# Altium PCB Dice RGB.PcbDoc
Units mm, origin at the board's own origin, x right, y up, seen from the top; angles counter-clockwise.
Board outline 25 x 52.5 mm, 2 copper layers (Top Layer, Bottom Layer), stack 1.57 mm thick; 111 components, 88 nets, 377 pads, 156 vias.
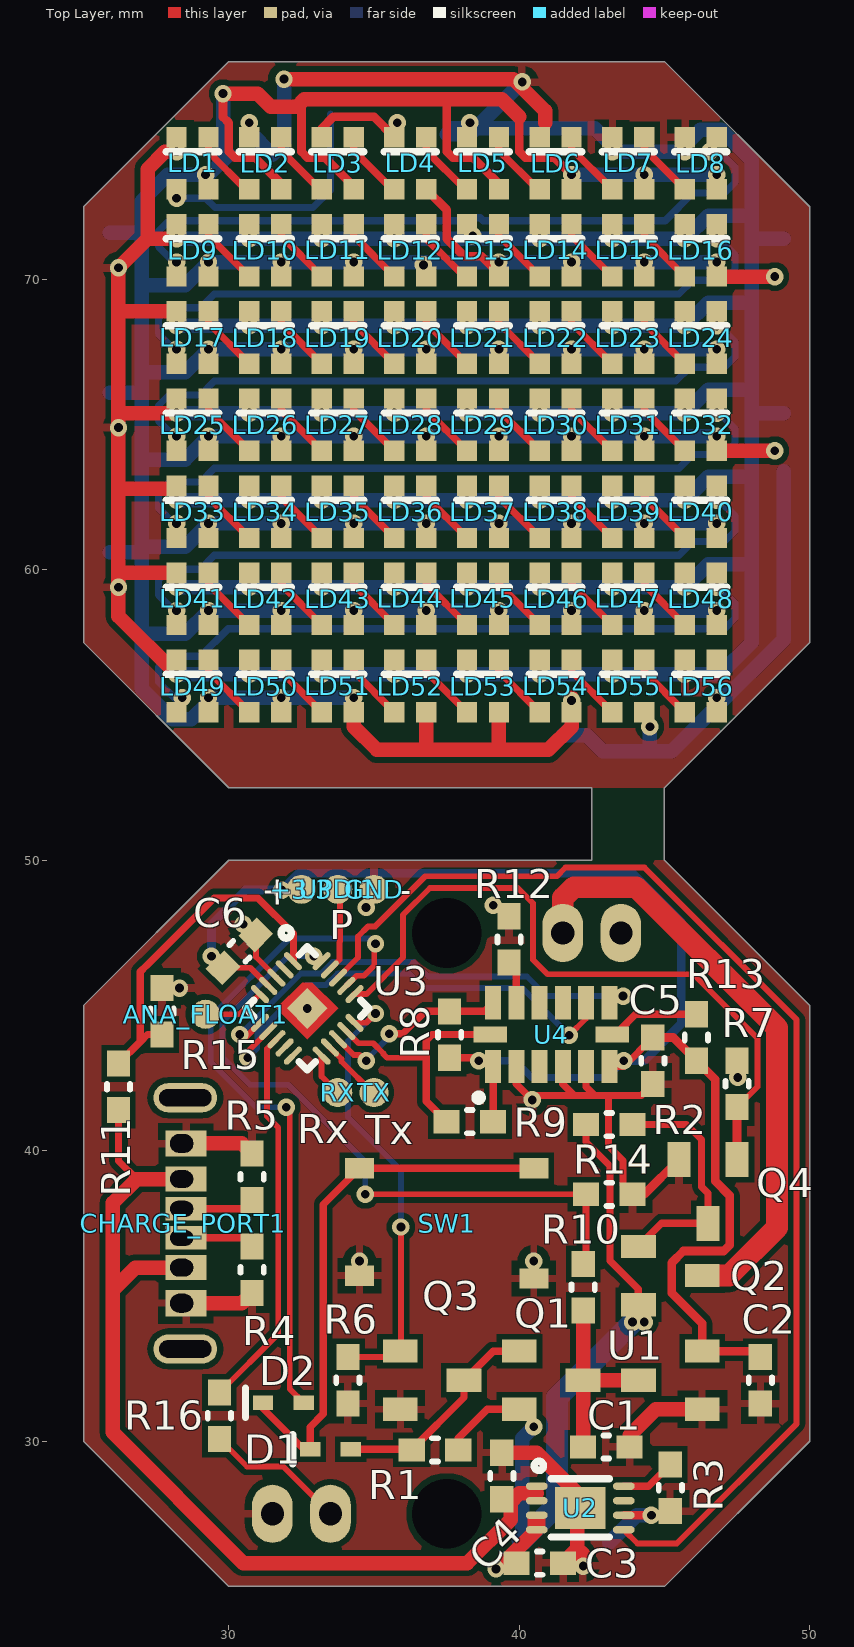
[diagram p0: Top Layer view]
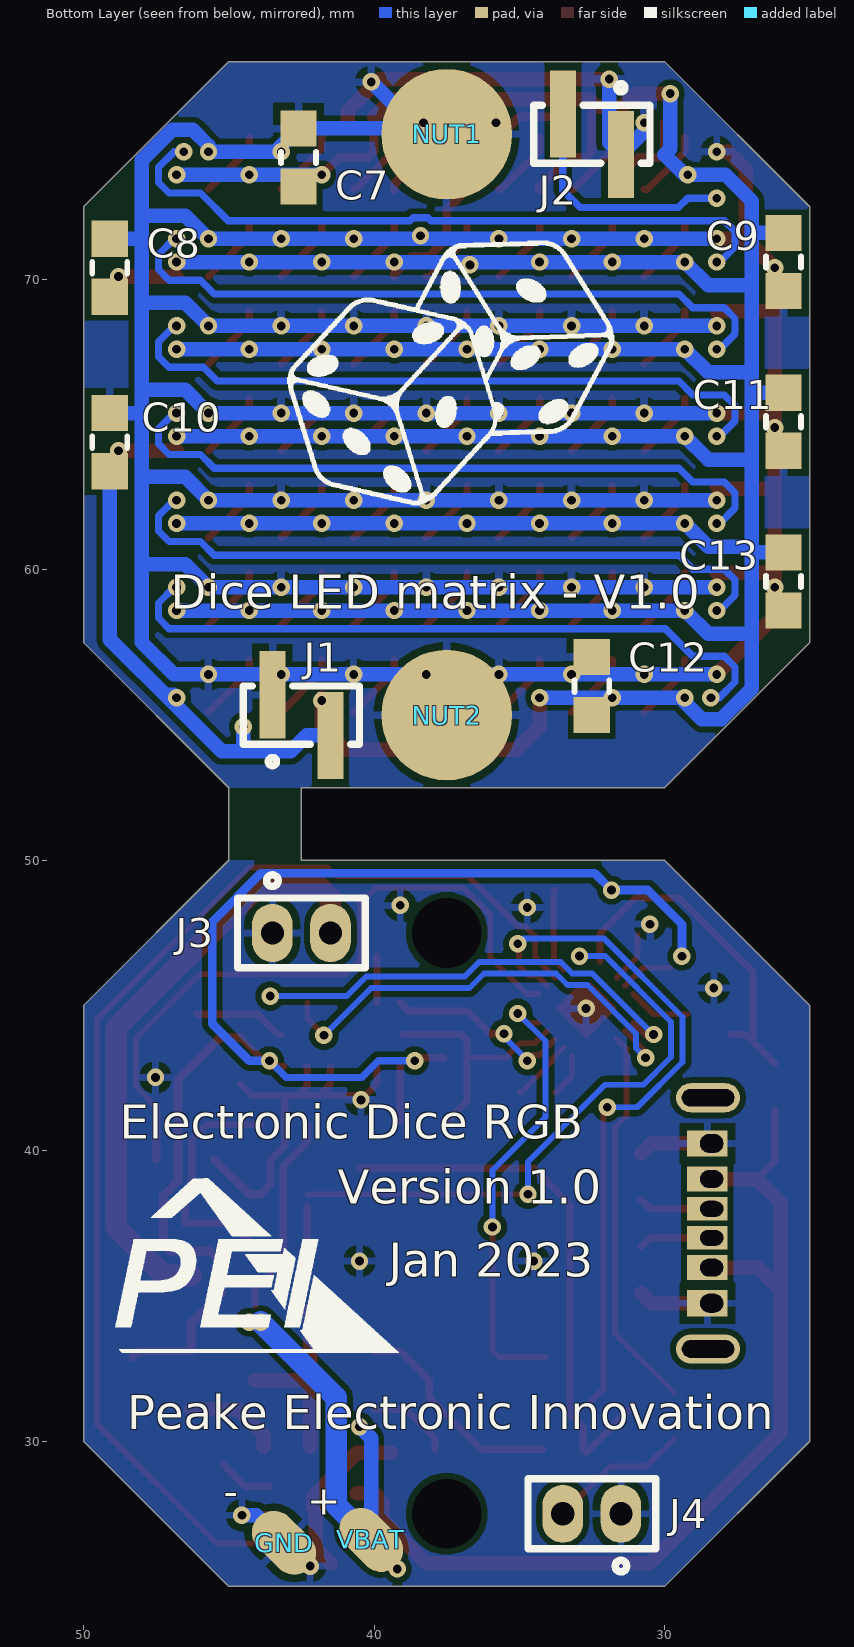
[diagram p1: Bottom Layer view, seen from below]
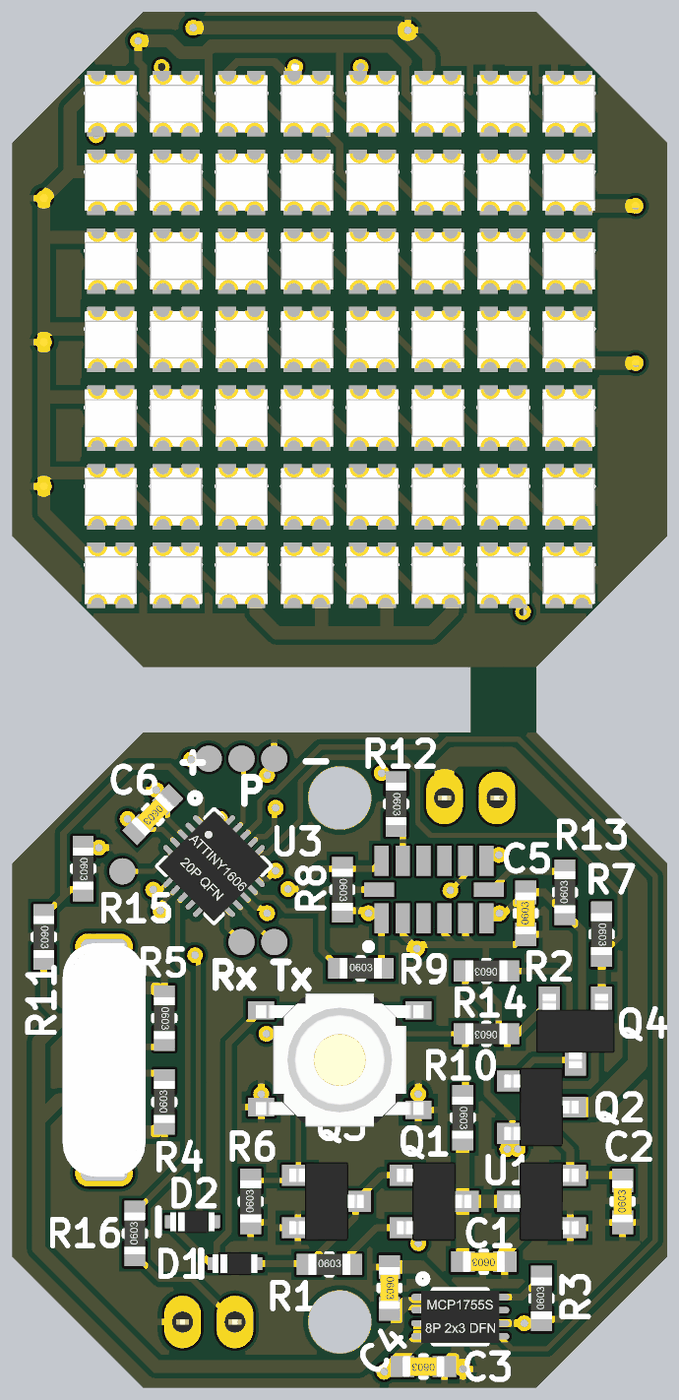
[diagram p2: 3D render of the assembled board from above, using the file's embedded part models]
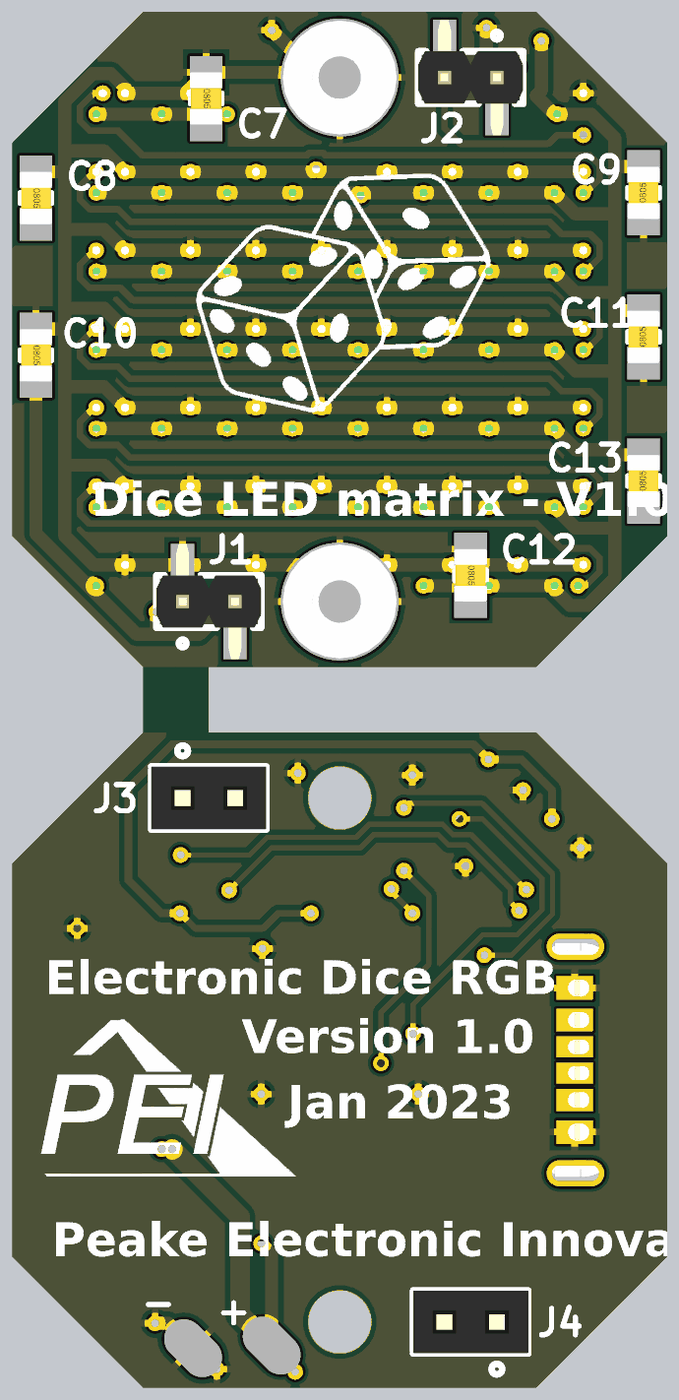
[diagram p3: 3D render of the assembled board from below, using the file's embedded part models]

## Layer stack, top to bottom
Top Solder: solder mask 0.015, Solder Resist, Dk 3.5
Top Layer: signal copper 0.035
Dielectric 1: dielectric 1.5, FR-4, Dk 4.8
Bottom Layer: signal copper 0.035
Bottom Solder: solder mask 0.015, Solder Resist, Dk 3.5

## Board outline
30,25 25,30 25,45 30,50 42.5,50 42.5,52.5 30,52.5 25,57.5 25,72.5 30,77.5 45,77.5 50,72.5 50,57.5 45,52.5 45,50 50,45 50,30 45,25

## Design rules (kind name [scope] priority, off if disabled: settings)
AssemblyTestPointUsage AssemblyTestPointUsage_1 [All] p2:
AssemblyTestpoint AssemblyTestpoint_1 [All] p2: testpointundercomponent=TRUE minsize=1.016 maxsize=2.54 preferedsize=1.524 minholesize=0 maxholesize=1.016 preferedholesize=0.813 testpointgrid=0.025 usegrid=TRUE gridtolerance=0 allowsidetop=TRUE allowsidebottom=TRUE
Clearance [All] p1: gap=0.254 ignorepadtopadclearanceinfootprint=FALSE
Clearance Clearance_1 [All] p2: gap=0.2 ignorepadtopadclearanceinfootprint=FALSE except(0.15: THPad-THPad)
ComponentClearance ComponentClearance_1 [All] p2 off: gap=0.254 collisioncheckmode=3 verticalgap=0.254 showdistances=FALSE
DiffPairsRouting DiffPairsRouting_1 [All] p2: maxlimit=0.254 minlimit=0.254 mostfreqgap=0.254 toplayer_minwidth=0.381 toplayer_maxwidth=0.381 toplayer_prefwidth=0.381 bottomlayer_minwidth=0.381 bottomlayer_maxwidth=0.381 bottomlayer_prefwidth=0.381 maxuncoupledlength=12.7
FabricationTestPointUsage FabricationTestPointUsage_1 [All] p2: valid=0 allowmultiple=FALSE
FabricationTestpoint FabricationTestpoint_1 [All] p2: side=3 testpointundercomponent=TRUE minsize=1.016 maxsize=2.54 preferedsize=1.524 minholesize=0 maxholesize=1.016 preferedholesize=0.813 testpointgrid=0.025 allowsidetop=TRUE allowsidebottom=TRUE usegrid=TRUE gridtolerance=0
FanoutControl Fanout_LCC [IsLCC] p1: bgadir=Out bgaviamode=Centered fanoutstyle=Auto fanoutdirection=Alternating viagrid=0.025 // Fanout_LCC (Default Rule)
FanoutControl Fanout_BGA [IsBGA] p2: bgadir=Out bgaviamode=Centered fanoutstyle=Auto fanoutdirection=Alternating viagrid=0.025 // Fanout_BGA (Default Rule)
FanoutControl Fanout_Default [All] p4: bgadir=Out bgaviamode=Centered fanoutstyle=Auto fanoutdirection=Alternating viagrid=0.025 // Fanout_Default (Default Rule)
FanoutControl Fanout_Small [(CompPinCount < 5)] p5: bgadir=Out bgaviamode=Centered fanoutstyle=Auto fanoutdirection=OutThenIn viagrid=0.025 // Fanout_Small (Default Rule)
FanoutControl Fanout_BGA_1 [IsBGA] p6: bgadir=Out bgaviamode=Centered fanoutstyle=Auto fanoutdirection=Alternating viagrid=0.025 // Fanout_BGA (Default Rule)
FanoutControl Fanout_LCC_1 [IsLCC] p7: bgadir=Out bgaviamode=Centered fanoutstyle=Auto fanoutdirection=Alternating viagrid=0.025 // Fanout_LCC (Default Rule)
FanoutControl Fanout_SOIC_1 [IsSOIC] p8: bgadir=Out bgaviamode=Centered fanoutstyle=Auto fanoutdirection=Alternating viagrid=0.025 // Fanout_SOIC (Default Rule)
FanoutControl Fanout_Small_1 [(CompPinCount < 5)] p9: bgadir=Out bgaviamode=Centered fanoutstyle=Auto fanoutdirection=OutThenIn viagrid=0.025 // Fanout_Small (Default Rule)
FanoutControl Fanout_Default_1 [All] p10: bgadir=Out bgaviamode=Centered fanoutstyle=Auto fanoutdirection=Alternating viagrid=0.025 // Fanout_Default (Default Rule)
Height Height_1 [All] p2: minheight=0 maxheight=25.4 prefheight=12.7
HoleSize HoleSize_1 [All] p2: absolutevalues=TRUE maxlimit=2.54 minlimit=0.025 maxpercent=80.000 minpercent=20.000
HoleToHoleClearance HoleToHoleClearance_1 [All] p2: gap=0.254 allowstackedmicrovias=TRUE
LayerPairs LayerPairs_1 [All] p2: enforce=TRUE
MinimumSolderMaskSliver MinimumSolderMaskSliver_1 [All] p2: minsoldermaskwidth=0.254
NetAntennae NetAntennae_1 [All] p2: netantennaetolerance=0
PasteMaskExpansion PasteMaskExpansion_1 [All] p2: expansion=0
PlaneClearance PlaneClearance_1 [All] p2: clearance=0.508
PlaneConnect PlaneConnect_1 [All] p2: planeconnectstyle=Relief reliefexpansion=0.508 reliefentries=4 reliefconductorwidth=0.254 reliefairgap=0.254
PolygonConnect [All] p1: connectstyle=Relief reliefconductorwidth=0.254 reliefentries=4 polygonreliefangle="90 Angle" airgapwidth=0.254
PolygonConnect PolygonConnect_1 [All] p2: connectstyle=Relief reliefconductorwidth=0.254 reliefentries=4 polygonreliefangle="90 Angle" airgapwidth=0.254
RoutingCorners RoutingCorners_1 [All] p2: cornerstyle=45-Degree minsetback=2.54 maxsetback=2.54
RoutingLayers RoutingLayers_1 [All] p2: top layer_v5=TRUE bottom layer_v5=TRUE
RoutingPriority RoutingPriority_1 [All] p2: routingpriority=0
RoutingTopology RoutingTopology_1 [All] p2: topology=Shortest
RoutingVias [All] p1: holewidth=0.711 width=1.27 viastyle="Through Hole" minholewidth=0.711 minwidth=1.27 maxholewidth=0.711 maxwidth=1.27
RoutingVias RoutingVias_1 [All] p2: holewidth=0.3 width=0.6 viastyle="Through Hole" minholewidth=0.3 minwidth=0.6 maxholewidth=2 maxwidth=3
ShortCircuit ShortCircuit_1 [All] p2: allowed=FALSE
SilkToBoardRegionClearance SilkToBoardRegionClearance_1 [All] p2:
SilkToSilkClearance SilkToSilkClearance_1 [All] p2: silktosilkclearance=0.254
SilkToSolderMaskClearance SilkToSolderMaskClearance_1 [IsPad] p2: minsilkscreentomaskgap=0.254 clearancetoexposedcopper=TRUE
SolderMaskExpansion [All] p1: expansion=0.102 istentingtop=FALSE
SolderMaskExpansion SolderMaskExpansion_1 [InPadClass('All Pads')] p2: expansion=0.102 istentingtop=FALSE
SolderMaskExpansion SolderMaskExpansion_via [All] p3: expansion=0.102 istentingtop=TRUE
UnRoutedNet UnRoutedNet_1 [All] p2:
UnpouredPolygon UnpouredPolygon_1 [All] p2 off:
Width [All] p1: maxlimit=0.254 minlimit=0.254 preferedwidth=0.254
Width Width_1 [All] p2: maxlimit=5 minlimit=0.2 preferedwidth=0.25
26 further rules are at their usual default settings.

## Classes and differential pairs
component class "Dice RGB - Sht 2": C7 C8 C9 C10 C11 C12 C13 J1 J2 LD1 LD2 LD3 LD4 LD5 LD6 LD7 LD8 LD9 LD10 LD11 LD12 LD13 LD14 LD15 LD16 LD17 LD18 LD19 LD20 LD21 LD22 LD23 LD24 LD25 LD26 LD27 LD28 LD29 LD30 LD31 LD32 LD33 LD34 LD35 LD36 LD37 LD38 LD39 LD40 LD41 LD42 LD43 LD44 LD45 LD46 LD47 LD48 LD49 LD50 LD51 LD52 LD53 LD54 LD55 LD56 NUT1 NUT2
component class "Dice RGB - Sht 1": +3.3 ANA_FLOAT1 C1 C2 C3 C4 C5 C6 CHARGE_PORT1 D1 D2 GND J3 J4 Q1 Q2 Q3 Q4 R1 R2 R3 R4 R5 R6 R7 R8 R9 R10 R11 R12 R13 R14 R15 R16 RX SW1 TX U1 U2 U3 U4 UPDI1 VBAT

## Components (designator, comment, footprint, x,y, rotation, side; value= is the part's Value field where it differs from the comment)
+3.3 "Prog Pad" "Prog Pad 1mm" 32.5,49 r90 top
ANA_FLOAT1 "Prog Pad" "Prog Pad 1mm" 29.2,44.7 r90 top
C1 "Capacitor" 0603_CAP 43,29.8 r180 top
C2 "Capacitor" 0603_CAP 48.3,32.1 r90 top
C3 "Capacitor" 0603_CAP 40.7,25.8 r180 top
C4 "Capacitor" 0603_CAP 39.4,28.8 r270 top
C5 "Capacitor" 0603_CAP 44.6,43.1 r90 top
C6 "Capacitor" 0603_CAP 30.366,46.866 r225 top
C7 "Capacitor" 0805_CAP 42.6,74.2 r270 bottom
C8 "Capacitor" 0805_CAP 49.1,70.4 r270 bottom
C9 "Capacitor" 0805_CAP 25.9,70.6 r90 bottom
C10 "Capacitor" 0805_CAP 49.1,64.4 r270 bottom
C11 "Capacitor" 0805_CAP 25.9,65.1 r90 bottom
C12 "Capacitor" 0805_CAP 32.5,56 r270 bottom
C13 "Capacitor" 0805_CAP 25.9,59.6 r90 bottom
CHARGE_PORT1 "USB C" USB-TYPE-C-014 28.5,37.5 r90 top
D1 "Diode" SOD-523 33.5,29.725 r180 top
D2 "Diode" SOD-523 31.875,31.325 r180 top
GND "Prog Pad" "Prog Pad 1mm" 35,49 r90 top
GND "Prog Pad" "Prog Pad 1.5 x 2.5mm" 43.1,26.5 r135 bottom
J1 "2_Pin" "2P 2mm SMD dbl height male header" 42.5,55 r180 bottom locked
J2 "2_Pin" "2P 2mm SMD dbl height male header" 32.5,75 r0 bottom locked
J3 "2_Pin" "2P 2mm PTH female header" 42.5,47.5 r180 bottom locked
J4 "2_Pin" "2P 2mm PTH female header" 32.5,27.5 r0 bottom locked
LD1 "WS2812B" WS2812B-2020 28.75,74 r90 top
LD2 "WS2812B" WS2812B-2020 31.25,74 r90 top
LD3 "WS2812B" WS2812B-2020 33.75,74 r90 top
LD4 "WS2812B" WS2812B-2020 36.25,74 r90 top
LD5 "WS2812B" WS2812B-2020 38.75,74 r90 top
LD6 "WS2812B" WS2812B-2020 41.25,74 r90 top
LD7 "WS2812B" WS2812B-2020 43.75,74 r90 top
LD8 "WS2812B" WS2812B-2020 46.25,74 r90 top
LD9 "WS2812B" WS2812B-2020 28.75,71 r90 top
LD10 "WS2812B" WS2812B-2020 31.25,71 r90 top
LD11 "WS2812B" WS2812B-2020 33.75,71 r90 top
LD12 "WS2812B" WS2812B-2020 36.25,71 r90 top
LD13 "WS2812B" WS2812B-2020 38.75,71 r90 top
LD14 "WS2812B" WS2812B-2020 41.25,71 r90 top
LD15 "WS2812B" WS2812B-2020 43.75,71 r90 top
LD16 "WS2812B" WS2812B-2020 46.25,71 r90 top
LD17 "WS2812B" WS2812B-2020 28.75,68 r90 top
LD18 "WS2812B" WS2812B-2020 31.25,68 r90 top
LD19 "WS2812B" WS2812B-2020 33.75,68 r90 top
LD20 "WS2812B" WS2812B-2020 36.25,68 r90 top
LD21 "WS2812B" WS2812B-2020 38.75,68 r90 top
LD22 "WS2812B" WS2812B-2020 41.25,68 r90 top
LD23 "WS2812B" WS2812B-2020 43.75,68 r90 top
LD24 "WS2812B" WS2812B-2020 46.25,68 r90 top
LD25 "WS2812B" WS2812B-2020 28.75,65 r90 top
LD26 "WS2812B" WS2812B-2020 31.25,65 r90 top
LD27 "WS2812B" WS2812B-2020 33.75,65 r90 top
LD28 "WS2812B" WS2812B-2020 36.25,65 r90 top
LD29 "WS2812B" WS2812B-2020 38.75,65 r90 top
LD30 "WS2812B" WS2812B-2020 41.25,65 r90 top
LD31 "WS2812B" WS2812B-2020 43.75,65 r90 top
LD32 "WS2812B" WS2812B-2020 46.25,65 r90 top
LD33 "WS2812B" WS2812B-2020 28.75,62 r90 top
LD34 "WS2812B" WS2812B-2020 31.25,62 r90 top
LD35 "WS2812B" WS2812B-2020 33.75,62 r90 top
LD36 "WS2812B" WS2812B-2020 36.25,62 r90 top
LD37 "WS2812B" WS2812B-2020 38.75,62 r90 top
LD38 "WS2812B" WS2812B-2020 41.25,62 r90 top
LD39 "WS2812B" WS2812B-2020 43.75,62 r90 top
LD40 "WS2812B" WS2812B-2020 46.25,62 r90 top
LD41 "WS2812B" WS2812B-2020 28.75,59 r90 top
LD42 "WS2812B" WS2812B-2020 31.25,59 r90 top
LD43 "WS2812B" WS2812B-2020 33.75,59 r90 top
LD44 "WS2812B" WS2812B-2020 36.25,59 r90 top
LD45 "WS2812B" WS2812B-2020 38.75,59 r90 top
LD46 "WS2812B" WS2812B-2020 41.25,59 r90 top
LD47 "WS2812B" WS2812B-2020 43.75,59 r90 top
LD48 "WS2812B" WS2812B-2020 46.25,59 r90 top
LD49 "WS2812B" WS2812B-2020 28.75,56 r90 top
LD50 "WS2812B" WS2812B-2020 31.25,56 r90 top
LD51 "WS2812B" WS2812B-2020 33.75,56 r90 top
LD52 "WS2812B" WS2812B-2020 36.25,56 r90 top
LD53 "WS2812B" WS2812B-2020 38.75,56 r90 top
LD54 "WS2812B" WS2812B-2020 41.25,56 r90 top
LD55 "WS2812B" WS2812B-2020 43.75,56 r90 top
LD56 "WS2812B" WS2812B-2020 46.25,56 r90 top
NUT1 "M2 x 4.9mm" "PCB Nut M2-SMD" 37.5,75 r180 bottom locked
NUT2 "M2 x 4.9mm" "PCB Nut M2-SMD" 37.5,55 r180 bottom locked
Q1 "PMOS" SOT-23-PMOS 41.1,32.1 r270 top
Q2 "PMOS" SOT-23-PMOS 45.2,35.7 r270 top
Q3 "NMOS" SOT-23 37,32.1 r270 top
Q4 "NMOS" SOT-23 46.5,38.6 r180 top
R1 "Resistor" 0603_RES 37.1,29.7 r0 top
R2 "Resistor" 0603_RES 43.1,40.9 r180 top
R3 "Resistor" 0603_RES 45.2,28.4 r90 top
R4 "Resistor" 0603_RES 30.8,35.9 r90 top
R5 "Resistor" 0603_RES 30.8,39.1 r270 top
R6 "Resistor" 0603_RES 34.1,32.1 r90 top
R7 "Resistor" 0603_RES 47.5,42.3 r270 top
R8 "Resistor" 0603_RES 37.6,44 r270 top
R9 "Resistor" 0603_RES 38.3,41 r0 top
R10 "Resistor" 0603_RES 42.2,35.3 r270 top
R11 "Resistor" 0603_RES 26.2,42.2 r270 top
R12 "Resistor" 0603_RES 39.65,47.275 r270 top
R13 "Resistor" 0603_RES 46.1,43.9 r90 top
R14 "Resistor" 0603_RES 43.1,38.5 r180 top
R15 "Resistor" 0603_RES 27.7,44.8 r270 top
R16 "Resistor" 0603_RES 29.675,30.875 r90 top
RX "Prog Pad" "Prog Pad 1mm" 33.75,42 r90 top
SW1 "Button" "PTS526 SK15 SMTR2 LFS SMD Tactile Push Button" 37.5,37.5 r0 top locked
TX "Prog Pad" "Prog Pad 1mm" 35,42 r90 top
U1 "LR7533-T" SOT-23 45.2,32.1 r90 top
U2 "MCP73832" "8P 2x3 DFN" 42.1,27.7 r0 top
U3 "ATTINY1606" "20P 3x3 VQFN" 32.7,44.9 r315 top
U4 "ADXL345BCCZ-RL" ADI-CC-14-1_V 41.1,44 r90 top
UPDI1 "Prog Pad" "Prog Pad 1mm" 33.75,49 r90 top
VBAT "Prog Pad" "Prog Pad 1.5 x 2.5mm" 40.1,26.6 r135 bottom

## Footprints (in the part's own frame and the unit in brackets; to place one, negate y for a bottom-side part, rotate by r counter-clockwise, add the part's x,y. Pads: shape width x height; smd on the part's side, far side on the other; paste and mask are expansions set on the pad)
"2P 2mm PTH female header" [mm] "4.3mm height"
  oval 1.4x2 hole 0.8: 1(-1,0) 2(1,0)
  silkscreen extent -2.2,-1.2 2.2,2, body extent -2.2,-1.2 2.2,1.2, height 4.3
"2P 2mm SMD dbl height male header" [mm] "4mm mating length, 11.2mm overall height"
  rect 0.89x3 smd: 1(-1,0.7) 2(1,-0.7)
  silkscreen extent -2,-1.74 2,1, body extent -2,-2.2 2,2.2, height 11.25
"8P 2x3 DFN" [mm]
  oval 0.75x0.25 smd: 1(-1.5,0.75) 2(-1.5,0.25) 3(-1.5,-0.25) 4(-1.5,-0.75) 5(1.5,-0.75) 6(1.5,-0.25) 7(1.5,0.25) 8(1.5,0.75)
  rect 1.75x1.45 smd: 9(0,0)
  silkscreen extent -1.58,-1 1,1.61, body extent -1.5,-1 1.5,1, height 0.91
"20P 3x3 VQFN" [mm]
  oval 0.8x0.2 smd mask+0.025: 1(-1.5,0.8) 2(-1.5,0.4) 3(-1.5,0) 4(-1.5,-0.4) 5(-1.5,-0.8) 11(1.5,-0.8) 12(1.5,-0.4) 13(1.5,0) 14(1.5,0.4) 15(1.5,0.8)
  oval 0.2x0.8 smd mask+0.025: 6(-0.8,-1.5) 7(-0.4,-1.5) 8(0,-1.5) 9(0.4,-1.5) 10(0.8,-1.5) 16(0.8,1.5) 17(0.4,1.5) 18(0,1.5) 19(-0.4,1.5) 20(-0.8,1.5)
  rect 1x1 smd mask+0.025: PAD(0,0)
  Top Layer region: 0.75,-0.75 0.75,0.75 -0.5,0.75 -0.75,0.5 -0.75,-0.75
  silkscreen extent -2.53,-1.5 1.5,1.5, body extent -1.5,-1.5 1.5,1.5, height 0.85
0603_CAP [mm] "SMD Capacitor 0603"
  rect 0.9x0.8 smd: 1(-0.8,0) 2(0.8,0)
  silkscreen extent -0.1,-0.4 0.1,0.4, body extent -0.8,-0.4 0.8,0.4, height 0.8
0603_RES [mm] "SMD Resistor 0603"
  rect 0.9x0.8 smd: 1(-0.8,0) 2(0.8,0)
  silkscreen extent -0.1,-0.4 0.1,0.4, body extent -0.8,-0.4 0.8,0.4, height 0.5
0805_CAP [mm] "SMD Capacitor 0805"
  rect 1.25x1.25 smd: 1(-1,0) 2(1,0)
  silkscreen extent -0.2,-0.6 0.2,0.6, body extent -1,-0.62 1,0.63, height 1.25
ADI-CC-14-1_V [mm] "LGA, 14-Leads, Body 5x3mm, Pitch 0.8mm"
  rect 1.145x0.55 smd: 1(-1.098,2) 2(-1.098,1.2) 3(-1.098,0.4) 4(-1.098,-0.4) 5(-1.098,-1.2) 6(-1.098,-2) 8(1.097,-2) 9(1.097,-1.2) 10(1.097,-0.4) 11(1.097,0.4) 12(1.097,1.2) 13(1.097,2)
  rect 0.55x1.145 smd: 7(0,-2.098) 14(0,2.098)
  silkscreen extent -2.3,2.37 -2.05,2.62, body extent -1.5,-2.5 1.5,2.5, height 1
"PCB Nut M2-SMD" [mm]
  round 4.5 smd: 1(0,0)
  body extent -2.17,-2.17 2.18,2.17, height 4.9
"Prog Pad 1.5 x 2.5mm" [mm]
  oval 1.5x2.5 smd: 1(0,0)
"Prog Pad 1mm" [mm]
  round 1 smd: 1(0,0)
"PTS526 SK15 SMTR2 LFS SMD Tactile Push Button" [mm]
  rect 1x0.7 smd: 1(-3,1.9) 1(3,1.9) 2(-3,-1.8) 2(3,-1.9)
  body extent -3.2,-2.55 3.2,2.55, height 1.55
SOD-523 [mm]
  rect 0.7x0.5 smd: 1(0.7,0) 2(-0.7,0)
  silkscreen extent 1.3,-0.5 1.3,0.5, body extent -0.85,-0.42 0.85,0.43, height 0.7
SOT-23 [mm]
  rect 0.8x1.2 smd: 1(-1,-1.1) 2(0,1.1) 3(1,-1.1)
  body extent -1.5,-1.42 1.5,1.42, height 1.2
SOT-23-PMOS [mm]
  rect 0.8x1.2 smd: 1(-1,-1.1) 2(1,-1.1) 3(0,1.1)
  body extent -1.5,-1.42 1.5,1.42, height 1.2
USB-TYPE-C-014 [mm] "Low cost power only USB-C connector from LCSC"
  rect 0.8x1.4 hole 0.8 slot 0.54 at 0 deg copper offset 0,-0.15: A5(-0.5,0.125) B5(0.5,0.125)
  rect 0.86x1.4 hole 0.8 slot 0.6 at 0 deg copper offset 0,-0.15: A9(1.525,0.125) B9(-1.525,0.125)
  rect 0.9x1.4 hole 0.8 slot 0.64 at 0 deg copper offset 0,-0.15: A12(2.75,0.125) B12(-2.75,0.125)
  oval 1x2.2 hole 1.8 slot 0.6 at 0 deg: EXT_SHLD(-4.325,0) EXT_SHLD(4.325,0)
  body extent -4.47,-1.58 4.47,1.58, height 6.8
WS2812B-2020 [mm]
  rect 0.7x0.7 smd mask+0.01: 1(-0.9,-0.55) 2(0.9,-0.55) 3(0.9,0.55) 4(-0.9,0.55)
  silkscreen extent 0.4,-0.9 0.4,0.9, body extent -1.1,-1 1.1,1, height 0.86

## Part data
+3.3 ANA_FLOAT1 GND GND RX TX UPDI1 VBAT: library part CMP-00044-1, "Programmer pogo-pin interface pad (or test pad)"
C1 C2 C3 C4 C5 C6 C7 C8 C9 C10 C11 C12 C13: library part CMP-001-00083-1, "SMD Capacitor"
CHARGE_PORT1: library part CMP-00005-5, "Vertical or RA Type C Usb Connector Rohs Compliant: Yes"
D1 D2: library part CMP-004-00031-3, "SMD Diode"
J1 J2 J3 J4: library part CMP-002-00074-4, "2 Pin Connector"
LD1 LD2 LD3 LD4 LD5 LD6 LD7 LD8 LD9 LD10 LD11 LD12 LD13 LD14 LD15 LD16 LD17 LD18 LD19 LD20 LD21 LD22 LD23 LD24 LD25 LD26 LD27 LD28 LD29 LD30 LD31 LD32 LD33 LD34 LD35 LD36 LD37 LD38 LD39 LD40 LD41 LD42 LD43 LD44 LD45 LD46 LD47 LD48 LD49 LD50 LD51 LD52 LD53 LD54 LD55 LD56: library part CMP-007-00035-3, "Intelligent Control LED Integrated Light Source, 3.5 to 5.3 V, -25 to 80 degC, 4-Pin SMD, RoHS, Bulk"
NUT1 NUT2: library part CMP-00059-1, "SMD or through hole soldered PCB nut"
Q1 Q2: library part CMP-004-0033-1, "P Channel MOSFET"
Q3 Q4: library part CMP-004-0025-1, "N Channel MOSFET"
R1 R2 R3 R4 R5 R6 R7 R8 R9 R10 R11 R12 R13 R14 R15 R16: library part CMP-009-00177-1, "SMD Resistor"
SW1: library part CMP-011-00013-4, "Momentary push button"
U1: library part CMP-00058-1, "55dB@1kHz 100mA 1.5uA -10℃~85℃ Fixed 3.3V~3.3V Positive 1 24V SOT-23-3 Linear Voltage Regulators (LDO) ROHS"
U2: library part CMP-00057-1, "Battery Management Li-Ion/Li-Poly Charg Mgnt 4.2V Vreg out"
U3: library part CMP-00040-2, "8-bit AVR MCU, 16 KB, 1024 Bytes, 20 MHz, 1.8 to 5.5V, VQFN-20, RoHS"
U4: library part CMP-010-00001-2, "3-Axis, +/-2 g / +/-4 g / +/-8 g / +/-16 g Digital Accelerometer with Digital Output, 1.6 KHz BW, -40 to 85 degC, 14-Pin LGA, Reel"

## Free pads (board coordinates)
  round 0 hole 2.4: ""(37.5,27.5) ""(37.5,47.5)

## Via types
v1: diameter 0.6, hole 0.3, Top Layer to Bottom Layer, 156 vias

## Nets (pads, with @x,y where several pads share a name; then routed paths per layer and width w, separated by ;. In a path a pad name is that pad's centre, name@x,y a point inside that pad or via, vN(x,y) a via of type N, cw(c..) or ccw(c..) an arc to the next point about the centre after c; other vN are vias at no path point)
+3.3: +3.3.1 C2.2 C5.2 C6.2 R8.2 R9.2 R13.1 U1.3 U3.4 U4.1 U4.6 | length 53.3
  Top Layer w0.2: C6.2 30.734,46.3 U3.4
  Top Layer w0.25: R8.2 38.5,43.2 v1(38.6,43.1) ; R9.2 U4.1 ; U4.6 43.602,42.902 C5.2
  Top Layer w0.3: C5.2 45.3,43.9 R13.1 46.75,42.45 46.75,38.955 47.25,38.455 47.25,36.755 47.045,36.55 45.655,36.55 45.25,36.145 45.25,35.1 46.3,34.05 U1.3 48.1,33.1 C2.2
  Bottom Layer w0.25: v1(38.6,43.1) 39.85,43.1 40.425,42.525 43.025,42.525 v1(43.6,43.1)
  Bottom Layer w0.3: v1(29.4,46.7) 29.4,47.8 30.575,48.975 v1(31.825,48.975) 32.402,49.552 43.898,49.552 45.575,47.875 45.575,44.375 44.3,43.1 v1(43.6,43.1)
ANA_FLOAT: ANA_FLOAT1.1 U3.5 | length 2.2
  Top Layer w0.2: ANA_FLOAT1.1 30.379,44.7 U3.5
AXL_INT1: U3.6 U4.8 | length 15.7
  Top Layer w0.2: v1(30.376,44.002) 30.416,44.002 30.544,43.875 U3.6
  Bottom Layer w0.2: v1(30.376,44.002) 30.388,44.002 32.488,46.102 33.175,46.102 33.573,46.5 36.379,46.5 36.879,46 40.266,46 40.941,45.325 v1(43.575,45.325)
AXL_INT2: U3.7 U4.9 | length 16
  Top Layer w0.2: v1(30.65,43.2) 30.65,43.416 U3.7 ; v1(41.725,43.975) 42.3,44.55 U4.9
  Bottom Layer w0.2: v1(30.65,43.2) 30.976,43.526 30.976,44.025 32.654,45.702 33.341,45.702 33.739,46.1 36.213,46.1 36.713,45.6 40.1,45.6 v1(41.725,43.975)
BATT_VOLTS: R10.1 R14.2 U3.20 | length 22.5
  Top Layer w0.2: v1(34.7,38.5) R14.2
  Top Layer w0.25: R10.1 42.3,36.2 R14.2@42.3,38.1
  Bottom Layer w0.2: v1(32.927,46.702) 32.043,46.702 29.776,44.436 29.776,43.225 30.726,42.275 32.049,42.275 34.7,39.624 v1(34.7,38.5)
BUTTON: D2.2 U3.17 | length 24.1
  Top Layer w0.2: v1(31.975,41.5) 32.1,41.375 32.1,31.8 D2.2 ; U3.17 34.393,46.027 34.656,46.027 35.007,46.379 35.007,47.082 v1(35.05,47.125)
  Bottom Layer w0.2: v1(31.975,41.5) 30.936,41.5 29.376,43.059 29.376,44.601 32.077,47.302 34.873,47.302 v1(35.05,47.125)
CC_STAT: U2.5 U3.18 | length 41.7
  Top Layer w0.2: U3.18 34.45,46.65 34.45,47.374 34.801,47.725 35.038,47.725 36.763,49.45 41.295,49.45 41.595,49.75 44.308,49.75 49.55,44.508 49.55,30.6 45.425,26.475 44.075,26.475 U2.5
GND: C1.1 C2.1 C3.1 C4.1 C5.1 C6.1 CHARGE_PORT1.A12 CHARGE_PORT1.B12 GND.1 J3.1 J4.1 Q3.3 Q4.3 R3.1 R4.1 R5.1 R6.1 R7.1 R12.1 R14.1 R15.1 SW1.2 U1.1 U2.6 U2.9 U3.3 U3.PAD U4.2 U4.4 U4.5 | length 33.4
  Top Layer w0.2: C6.1 30.931,46.669 U3.3
  Top Layer w0.25: U4.2 39.9,42.3 v1(40.45,41.75) 40.6,41.9 41.9,41.9 ; U4.4 41.5,42.3 41.9,41.9 ; U4.5 42.3,42.2 42.6,41.9 ; R14.1 43.575,38.825 43.575,39.661 43.075,40.161 43.075,41.875 43.05,41.9 ; C5.1 44.2,41.9 43.05,41.9 ; 41.9,41.9 42.6,41.9 ; 42.6,41.9 43.05,41.9
  Top Layer w0.3: U2.6 v1(44.55,27.45) ; R14.1 44.3,38.5 Q4.3
  Top Layer w0.5: CHARGE_PORT1.B12 30.45,34.75 R4.1 ; CHARGE_PORT1.A12 30.45,40.25 R5.1 ; C4.1 40.6,29.6 42.1,28.1 U2.9 42,27.6 42,26.3 ; C3.1 42,26.3 ; v1(42.2,25.7) 42.2,26.1 42,26.3 ; C1.1 43.8,30.2 44.7,31.1 U1.1
  Bottom Layer w0.5: GND.1@43.1,26.5 44.05,27.45 v1(44.55,27.45)
  other v1: 34.5,36.2 40.5,36.2 47.525,42.525 32.7,44.9 28.3,45.6 30.5,47.8 34.725,48.375 39.1,48.45
L_GND: C7.1 C8.1 C9.1 C10.1 C11.1 C12.1 C13.1 J1.1 J2.1 LD1.3 LD2.3 LD3.3 LD4.3 LD5.3 LD6.3 LD7.3 LD8.3 LD9.3 LD10.3 LD11.3 LD12.3 LD13.3 LD14.3 LD15.3 LD16.3 LD17.3 LD18.3 LD19.3 LD20.3 LD21.3 LD22.3 LD23.3 LD24.3 LD25.3 LD26.3 LD27.3 LD28.3 LD29.3 LD30.3 LD31.3 LD32.3 LD33.3 LD34.3 LD35.3 LD36.3 LD37.3 LD38.3 LD39.3 LD40.3 LD41.3 LD42.3 LD43.3 LD44.3 LD45.3 LD46.3 LD47.3 LD48.3 LD49.3 LD50.3 LD51.3 LD52.3 LD53.3 LD54.3 LD55.3 LD56.3 NUT1.1 NUT2.1 | length 201.4
  Top Layer w0.3: LD3.3 33.2,75.2 33.6,75.6 35,75.6 LD4.3
  Top Layer w0.5: v1(28.2,56.4) 26.2,58.4 v1(26.2,59.4) 26.2,59.9 ; LD41.3 26.2,59.9 ; LD33.3 28.1,62.8 26.2,62.8 ; v1(28.2,65.4) 26.2,65.4 ; LD17.3 26.2,68.9 ; v1(28.2,71.4) 27.2,71.4 ; v1(28.2,74.4) 27.8,74.4 27.2,73.8 27.2,71.4 ; v1(31.9,76.9) 39.8,76.9 40.9,75.8 40.9,75.4 ; 26.2,59.9 26.2,62.8 ; 26.2,62.8 v1(26.2,64.9) 26.2,65.4 ; 26.2,65.4 26.2,68.9 ; 26.2,68.9 v1(26.2,70.4) 27.2,71.4
  Bottom Layer w0.5: v1(28.2,56.4) v1(30.7,56.4) v1(33.2,56.4) v1(35.7,56.4) v1(38.2,56.4) v1(40.7,56.4) v1(43.2,56.4) v1(45.7,56.4) 46.9,56.4 48,57.5 48,60.2 ; v1(28.2,59.4) v1(30.7,59.4) v1(33.2,59.4) v1(35.7,59.4) v1(38.2,59.4) v1(40.7,59.4) v1(43.2,59.4) v1(45.7,59.4) 46.5,60.2 48,60.2 ; v1(28.2,62.4) v1(30.7,62.4) v1(33.2,62.4) v1(35.7,62.4) v1(38.2,62.4) v1(40.7,62.4) v1(43.2,62.4) v1(45.7,62.4) 46.5,63.2 48,63.2 ; v1(28.2,65.4) v1(30.7,65.4) v1(33.2,65.4) v1(35.7,65.4) v1(38.2,65.4) v1(40.7,65.4) v1(43.2,65.4) v1(45.7,65.4) 46.5,66.2 48,66.2 ; v1(28.2,68.4) v1(30.7,68.4) v1(33.2,68.4) v1(35.7,68.4) v1(38.2,68.4) v1(40.7,68.4) v1(43.2,68.4) v1(45.7,68.4) 46.5,69.2 48,69.2 ; v1(28.2,71.4) v1(30.7,71.4) v1(33.2,71.4) v1(35.7,71.4) 38.3,71.4 v1(38.4,71.5) 38.5,71.4 v1(40.7,71.4) v1(43.2,71.4) v1(45.7,71.4) 46.5,72.2 48,72.2 ; v1(30.7,75.4) 30.7,75.1 J2.1 31.9,74.7 v1(31.9,76.9) ; v1(40.1,76.8) NUT1.1@38.5,75.2 ; v1(43.2,74.4) v1@43.4,74.4 ; C10.1 48,65.4 ; C8.1 48.1,71.4 48,71.3 ; NUT1.1@38.5,75.2 38.3,75 NUT1.1 37.7,75.2 NUT1.1@38.5,75.2 ; NUT1.1@38.5,75.2 C7.1 v1@43.4,74.4 ; v1@43.4,74.4 v1(45.7,74.4) 45.7,74.611 46.239,75.15 46.45,75.15 46.947,75.15 48,74.097 48,72.2 ; 48,60.2 48,63.2 ; 48,63.2 48,65.4 ; 48,65.4 48,66.2 ; 48,66.2 48,69.2 ; 48,69.2 48,71.3 ; 48,71.3 48,72.2
  other v1: 35.8,75.4 38.3,75.4
L_V+: C7.2 C8.2 C9.2 C10.2 C11.2 C12.2 C13.2 J1.2 LD1.1 LD2.1 LD3.1 LD4.1 LD5.1 LD6.1 LD7.1 LD8.1 LD9.1 LD10.1 LD11.1 LD12.1 LD13.1 LD14.1 LD15.1 LD16.1 LD17.1 LD18.1 LD19.1 LD20.1 LD21.1 LD22.1 LD23.1 LD24.1 LD25.1 LD26.1 LD27.1 LD28.1 LD29.1 LD30.1 LD31.1 LD32.1 LD33.1 LD34.1 LD35.1 LD36.1 LD37.1 LD38.1 LD39.1 LD40.1 LD41.1 LD42.1 LD43.1 LD44.1 LD45.1 LD46.1 LD47.1 LD48.1 LD49.1 LD50.1 LD51.1 LD52.1 LD53.1 LD54.1 LD55.1 LD56.1 | length 207.5
  Top Layer w0.3: v1(29.8,76.4) 29.8,75.595 30,75.395 30,74.405 30.205,74.2 30.9,74.2 31.8,73.3 LD2.1 ; 32.5,76.1 32.5,75.395 32.5,74.405 32.705,74.2 33.3,74.2 34.3,73.2 LD3.1 ; LD4.1@36.8,73.3 LD4.1 37.5,72.4 37.5,71.405 38.105,70.8 38.7,70.8 39.3,70.2 LD13.1 ; 37.5,76.2 37.5,75.395 37.5,74.405 37.705,74.2 38.4,74.2 39.3,73.3 LD5.1 ; 40,75.6 40,74.405 40.205,74.2 41.2,74.2 v1(41.8,73.6)
  Top Layer w0.5: v1(29.8,76.4) 31,76.4 31.45,75.95 32.35,75.95 ; 32.5,76.1 32.6,76.2 37.5,76.2 39.4,76.2 40,75.6 ; v1(34.3,55.6) 34.3,54.6 35.1,53.8 36.8,53.8 ; LD52.1 36.8,53.8 ; LD53.1 39.3,53.8 ; v1@41.8,55.6 v1(41.8,55.5) 41.8,54.6 41,53.8 39.3,53.8 ; LD32.1 v1(48.8,64.1) ; LD16.1 v1(48.8,70.1) ; 36.8,53.8 39.3,53.8
  Bottom Layer w0.5: C13.2 26.9,60.6 27,60.5 ; C11.2 27,66.1 ; C9.2 27,71.6 ; v1(29.8,76.4) 29.8,74.5 30,74.3 29.3,73.6 v1(29.2,73.6) 27.9,73.6 27,72.7 27,71.6 ; v1(34.3,55.6) v1(31.8,55.6) v1(29.3,55.6) 29.3,55.439 28.711,54.85 28.053,54.85 27,55.903 27,57.8 ; J1.2 42.319,54.3 42.869,53.75 44.5,53.75 ; v1(41.8,73.6) v1(44.3,73.6) v1(46.8,73.6) ; v1(44.5,54.6) 44.5,53.75 ; v1(46.8,58.6) v1(44.3,58.6) v1(41.8,58.6) v1(39.3,58.6) v1(36.8,58.6) v1(34.3,58.6) v1(31.8,58.6) v1(29.3,58.6) 28.5,57.8 27,57.8 ; v1(46.8,61.6) v1(44.3,61.6) v1(41.8,61.6) v1(39.3,61.6) v1(36.8,61.6) v1(34.3,61.6) v1(31.8,61.6) v1(29.3,61.6) 28.5,60.8 27,60.8 ; v1(46.8,64.6) v1(44.3,64.6) v1(41.8,64.6) v1(39.3,64.6) v1(36.8,64.6) v1(34.3,64.6) v1(31.8,64.6) v1(29.3,64.6) 28.5,63.8 27,63.8 ; v1(46.8,67.6) v1(44.3,67.6) v1(41.8,67.6) v1(39.3,67.6) v1(36.8,67.6) v1(34.3,67.6) v1(31.8,67.6) v1(29.3,67.6) 28.5,66.8 27,66.8 ; v1(46.8,70.6) v1(44.3,70.6) v1(41.8,70.6) v1(39.3,70.6) 36.8,70.6 v1(36.7,70.5) 36.6,70.6 v1(34.3,70.6) v1(31.8,70.6) v1(29.3,70.6) 28.5,69.8 27,69.8 ; C10.2 49.1,57.61 ; 27,57.8 27,60.5 ; 27,60.5 27,60.8 ; 27,60.8 27,63.8 ; 27,63.8 27,66.1 ; 27,66.1 27,66.8 ; 27,66.8 27,69.8 ; 27,69.8 27,71.6 ; 44.5,53.75 45.25,53.75 v1@46.8,55.3 ; v1@46.8,55.3 49.1,57.6 49.1,57.61 ; v1@46.8,55.3 v1(46.8,55.6) 46.9,55.7 47.19,55.7 49.1,57.61
LED_DAT: R16.2 U3.8 | length 13.3
  Top Layer w0.2: R16.2 31.7,33.7 31.7,40.8 31.31,41.19 31.31,43.51 U3.8
LED_DAT_R1: J2.2 LD1.4 | length 8.3
  Bottom Layer w0.25: v1(28.2,72.8) 29.2,72.8 29.525,72.475 32.9,72.475 33.5,73.075 J2.2
LED_DAT_R2: LD8.2 LD9.4 | length 23.6
  Bottom Layer w0.25: v1(28.2,70.6) 28.1,70.6 27.6,71.1 27.6,71.116 27.575,71.141 27.575,71.659 27.941,72.025 38.041,72.025 38.141,72.125 38.659,72.125 38.759,72.025 45.025,72.025 45.975,72.975 47.059,72.975 47.425,73.341 47.425,73.859 46.884,74.4 v1(46.55,74.4)
LED_DAT_R3: LD16.2 LD17.4 | length 23.3
  Bottom Layer w0.25: v1(28.2,67.6) 28.1,67.6 27.6,68.1 27.6,68.116 27.575,68.141 27.575,68.659 27.941,69.025 28.459,69.025 29.025,69.025 29.5,69.5 45.5,69.5 45.975,69.975 47.059,69.975 47.425,70.341 47.425,70.859 46.884,71.4 v1(46.8,71.4)
LED_DAT_R4: LD24.2 LD25.4 | length 23.3
  Bottom Layer w0.25: v1(28.2,64.6) 28.1,64.6 27.6,65.1 27.6,65.116 27.575,65.141 27.575,65.659 27.941,66.025 29.025,66.025 29.5,66.5 45.4,66.5 45.875,66.975 47.059,66.975 47.425,67.341 47.425,67.859 46.884,68.4 v1(46.8,68.4)
LED_DAT_R5: LD32.2 LD33.4 | length 23.3
  Bottom Layer w0.25: v1(28.2,61.6) 28.1,61.6 27.6,62.1 27.6,62.116 27.575,62.141 27.575,62.659 27.941,63.025 28.459,63.025 29.025,63.025 29.5,63.5 45.5,63.5 45.975,63.975 47.059,63.975 47.425,64.341 47.425,64.859 46.884,65.4 v1(46.8,65.4)
LED_DAT_R6: LD40.2 LD41.4 | length 23.3
  Bottom Layer w0.25: v1(28.2,58.6) 28.1,58.6 27.6,59.1 27.6,59.116 27.575,59.141 27.575,59.659 27.941,60.025 28.459,60.025 29.025,60.025 29.5,60.5 45.5,60.5 45.975,60.975 47.059,60.975 47.425,61.341 47.425,61.859 46.884,62.4 v1(46.8,62.4)
LED_DAT_R7: LD48.2 LD49.4 | length 23.5
  Bottom Layer w0.25: v1(28.4,55.6) 28.116,55.6 27.575,56.141 27.575,56.659 27.941,57.025 29.025,57.025 29.975,57.975 47.059,57.975 47.425,58.341 47.425,58.859 46.884,59.4 v1(46.8,59.4)
LED_PWR: Q4.1 R7.2 U3.16 | length 24
  Top Layer w0.2: U3.16 34.745,45.395 36,46.65 36,48.121 36.929,49.05 39.949,49.05 40.475,48.524 40.475,46.575 40.975,46.075 45.999,46.075 48.2,43.874 48.2,42.2 R7.2
  Top Layer w0.3: Q4.1 R7.2
NetCHARGE_PORT1_A5: CHARGE_PORT1.A5 R4.2 | length 2.5
  Top Layer w0.25: CHARGE_PORT1.A5 30.5,37 R4.2
NetCHARGE_PORT1_B5: CHARGE_PORT1.B5 R5.2 | length 2.5
  Top Layer w0.25: CHARGE_PORT1.B5 30.5,38 R5.2
NetD1_1: D1.1 D2.1 SW1.1 | length 18.7
  Top Layer w0.25: D2.1@31.075,31.225 D1.1@32.687,29.613 ; D1.1 32.8,30.49 33.25,30.94 33.25,38.15 34.5,39.4 SW1.1@40.5,39.4
NetD1_2: D1.2 Q1.1 Q3.2 R1.1 | length 7.6
  Top Layer w0.25: D1.2 R1.1@36.3,29.725 ; R1.1 38.1,31.5 Q3.2 39.1,33.1 Q1.1
NetJ4_2: J4.2 R16.1 | length 4.9
  Top Layer w0.2: R16.1 30.625,29.125 31.875,29.125 J4.2
NetLD1_2: LD1.2 LD2.4 | length 2.4
  Top Layer w0.254: LD1.2 29.3,74.387 30.587,73.1 LD2.4
NetLD2_2: LD2.2 LD3.4 | length 2.4
  Top Layer w0.254: LD2.2 31.8,74.43 33.13,73.1 LD3.4
NetLD3_2: LD3.2 LD4.4 | length 2.4
  Top Layer w0.254: LD3.2 34.3,74.43 35.63,73.1 LD4.4
NetLD4_2: LD4.2 LD5.4 | length 2.4
  Top Layer w0.254: LD4.2 36.8,74.43 38.13,73.1 LD5.4
NetLD5_2: LD5.2 LD6.4 | length 2.4
  Top Layer w0.254: LD5.2 39.3,74.43 40.63,73.1 LD6.4
NetLD6_2: LD6.2 LD7.4 | length 2.4
  Top Layer w0.254: LD6.2 41.8,74.5 LD7.4
NetLD7_2: LD7.2 LD8.4 | length 2.4
  Top Layer w0.254: LD7.2 44.3,74.5 LD8.4
NetLD9_2: LD9.2 LD10.4 | length 2.4
  Top Layer w0.254: LD9.2 29.3,71.5 LD10.4
NetLD10_2: LD10.2 LD11.4 | length 2.4
  Top Layer w0.254: LD10.2 31.8,71.5 LD11.4
NetLD11_2: LD11.2 LD12.4 | length 2.4
  Top Layer w0.254: LD11.2 34.3,71.5 LD12.4
NetLD12_2: LD12.2 LD13.4 | length 2.4
  Top Layer w0.254: LD12.2 36.8,71.406 38.106,70.1 LD13.4
NetLD13_2: LD13.2 LD14.4 | length 2.4
  Top Layer w0.254: LD13.2 39.3,71.5 LD14.4
NetLD14_2: LD14.2 LD15.4 | length 2.4
  Top Layer w0.254: LD14.2 41.8,71.5 LD15.4
NetLD15_2: LD15.2 LD16.4 | length 2.4
  Top Layer w0.254: LD15.2 44.3,71.5 LD16.4
NetLD17_2: LD17.2 LD18.4 | length 2.4
  Top Layer w0.254: LD17.2 29.3,68.5 LD18.4
NetLD18_2: LD18.2 LD19.4 | length 2.4
  Top Layer w0.254: LD18.2 31.8,68.5 LD19.4
NetLD19_2: LD19.2 LD20.4 | length 2.4
  Top Layer w0.254: LD19.2 34.3,68.5 LD20.4
NetLD20_2: LD20.2 LD21.4 | length 2.4
  Top Layer w0.254: LD20.2 36.8,68.5 LD21.4
NetLD21_2: LD21.2 LD22.4 | length 2.4
  Top Layer w0.254: LD21.2 39.3,68.5 LD22.4
NetLD22_2: LD22.2 LD23.4 | length 2.4
  Top Layer w0.254: LD22.2 41.8,68.5 LD23.4
NetLD23_2: LD23.2 LD24.4 | length 2.4
  Top Layer w0.254: LD23.2 44.3,68.5 LD24.4
NetLD25_2: LD25.2 LD26.4 | length 2.4
  Top Layer w0.254: LD25.2 29.3,65.5 LD26.4
NetLD26_2: LD26.2 LD27.4 | length 2.4
  Top Layer w0.254: LD26.2 31.8,65.5 LD27.4
NetLD27_2: LD27.2 LD28.4 | length 2.4
  Top Layer w0.254: LD27.2 34.3,65.5 LD28.4
NetLD28_2: LD28.2 LD29.4 | length 2.4
  Top Layer w0.254: LD28.2 36.8,65.5 LD29.4
NetLD29_2: LD29.2 LD30.4 | length 2.4
  Top Layer w0.254: LD29.2 39.3,65.5 LD30.4
NetLD30_2: LD30.2 LD31.4 | length 2.4
  Top Layer w0.254: LD30.2 41.8,65.5 LD31.4
NetLD31_2: LD31.2 LD32.4 | length 2.4
  Top Layer w0.254: LD31.2 44.3,65.5 LD32.4
NetLD33_2: LD33.2 LD34.4 | length 2.4
  Top Layer w0.254: LD33.2 29.3,62.5 LD34.4
NetLD34_2: LD34.2 LD35.4 | length 2.4
  Top Layer w0.254: LD34.2 31.8,62.5 LD35.4
NetLD35_2: LD35.2 LD36.4 | length 2.4
  Top Layer w0.254: LD35.2 34.3,62.5 LD36.4
NetLD36_2: LD36.2 LD37.4 | length 2.4
  Top Layer w0.254: LD36.2 36.8,62.5 LD37.4
NetLD37_2: LD37.2 LD38.4 | length 2.4
  Top Layer w0.254: LD37.2 39.3,62.5 LD38.4
NetLD38_2: LD38.2 LD39.4 | length 2.4
  Top Layer w0.254: LD38.2 41.8,62.5 LD39.4
NetLD39_2: LD39.2 LD40.4 | length 2.4
  Top Layer w0.254: LD39.2 44.3,62.5 LD40.4
NetLD41_2: LD41.2 LD42.4 | length 2.4
  Top Layer w0.254: LD41.2 29.3,59.5 LD42.4
NetLD42_2: LD42.2 LD43.4 | length 2.4
  Top Layer w0.254: LD42.2 31.8,59.5 LD43.4
NetLD43_2: LD43.2 LD44.4 | length 2.4
  Top Layer w0.254: LD43.2 34.3,59.5 LD44.4
NetLD44_2: LD44.2 LD45.4 | length 2.4
  Top Layer w0.254: LD44.2 36.8,59.5 LD45.4
NetLD45_2: LD45.2 LD46.4 | length 2.4
  Top Layer w0.254: LD45.2 39.3,59.5 LD46.4
NetLD46_2: LD46.2 LD47.4 | length 2.4
  Top Layer w0.254: LD46.2 41.8,59.5 LD47.4
NetLD47_2: LD47.2 LD48.4 | length 2.4
  Top Layer w0.254: LD47.2 44.3,59.5 LD48.4
NetLD49_2: LD49.2 LD50.4 | length 2.4
  Top Layer w0.254: LD49.2 29.3,56.5 LD50.4
NetLD50_2: LD50.2 LD51.4 | length 2.4
  Top Layer w0.254: LD50.2 31.8,56.5 LD51.4
NetLD51_2: LD51.2 LD52.4 | length 2.4
  Top Layer w0.254: LD51.2 34.3,56.5 LD52.4
NetLD52_2: LD52.2 LD53.4 | length 2.4
  Top Layer w0.254: LD52.2 36.8,56.5 LD53.4
NetLD53_2: LD53.2 LD54.4 | length 2.4
  Top Layer w0.254: LD53.2 39.3,56.5 LD54.4
NetLD54_2: LD54.2 LD55.4 | length 2.4
  Top Layer w0.254: LD54.2 41.8,56.5 LD55.4
NetLD55_2: LD55.2 LD56.4 | length 2.4
  Top Layer w0.254: LD55.2 44.3,56.5 LD56.4
NetQ2_1: Q2.1 Q4.2 R2.1 | length 8.3
  Top Layer w0.25: R2.1 45.76,40.9 46.275,40.385 46.275,38.758 46.5,38.533 Q4.2 44.9,37.5 Q2.1
NetR3_2: R3.2 U2.8 | length 1.9
  Top Layer w0.25: U2.8 44.45,28.45 R3.2
NetR12_2: R12.2 U4.12 | length 1.6
  Top Layer w0.25: U4.12 R12.2@39.9,46.7
NetR13_2: R13.2 U4.7 | length 3.2
  Top Layer w0.25: U4.7 43.31,44 43.7,44.39 43.7,44.4 44,44.7 R13.2
PWR: Q3.1 R6.2 U3.15 | length 15.5
  Top Layer w0.2: R6.2 35.7,32.9 Q3.1 35.925,33.125 v1(35.925,37.375) ; U3.15 34.73,44.405 v1(35.05,44.725)
  Bottom Layer w0.2: v1(35.05,44.725) 34.1,43.775 34.1,41.15 35.925,39.325 v1(35.925,37.375)
RX: RX.1 U3.11 | length 1.5
  Top Layer w0.2: U3.11 33.195,42.555 RX.1
SCL: R9.1 U3.14 U4.14 | length 8.6
  Top Layer w0.2: U3.14 34.466,43.7 34.476,43.7 34.478,43.702 34.975,43.702 35.327,43.351 35.327,43.322 35.448,43.2 36.7,43.2 36.8,43.3
  Top Layer w0.25: R9.1 36.8,41.7 36.8,43.3 36.8,43.8 37,44 U4.14
SDA: R8.1 U3.13 U4.13 | length 6.6
  Top Layer w0.2: U3.13 34.3,43.3 34.5,43.3 34.698,43.102 v1(34.727,43.102)
  Top Layer w0.25: v1(35.527,44.027) 35.936,44.027 35.964,44 36.764,44.8 R8.1 38.802,44.8 U4.13
  Bottom Layer w0.2: v1(34.727,43.102) 34.727,43.127 35.527,43.927 v1(35.527,44.027)
TX: TX.1 U3.12 | length 2.2
  Top Layer w0.2: U3.12 33.875,43.159 33.875,43.076 34.951,42 TX.1
UPDI: U3.19 UPDI1.1 | length 2.9
  Top Layer w0.2: U3.19 33.807,46.573 33.807,47.181 33.825,47.199 33.825,48.925 UPDI1.1
USB_VOLTS: R11.1 R15.2 U3.1 | length 12.1
  Top Layer w0.25: R11.1 26.95,43.75 ; R15.2 27.2,44 26.95,43.75 ; U3.1@32.223,46.544 32.223,47.477 31,48.7 29.5,48.7 27.175,46.375 27.165,46.375 26.95,46.16 26.95,43.75
VBAT: C3.2 Q1.2 Q2.2 R1.2 R2.2 U2.3 U2.4 VBAT.1 | length 25
  Top Layer w0.25: R1.2 37.9,30.1 38.9,31.1 Q1.2 ; R2.2 42.3,40.3 43.125,39.475 43.125,36.215 44.1,35.24 Q2.2
  Top Layer w0.5: v1(39.2,25.6) 39.25,25.6 U2.4
  Bottom Layer w0.5: VBAT.1 40.1,30.1 v1(40.5,30.5)
  Bottom Layer w0.75: VBAT.1 41.3,27.8 41.3,31.5 v1(43.9,34.1)
  other v1: 44.3,34.1
VBUS: C4.2 CHARGE_PORT1.A9 CHARGE_PORT1.B9 R11.2 U2.1 U2.2 | length 33.8
  Top Layer w0.25: R11.2 26.2,39.65 26.825,39.025
  Top Layer w0.5: CHARGE_PORT1.B9 26.775,35.975 26,35.2 ; CHARGE_PORT1.A9 26.825,39.025 26,38.2 26,35.2 ; 40.6,28.2 40,28.2 39.7,27.9 39.7,27.3 38.2,25.8 30.5,25.8 26,30.3 26,35.2
VLED: J3.2 Q2.3 | length 20.9
  Top Layer w0.75: J3.2 41.5,48.7 41.875,49.075 44.028,49.075 48.875,44.228 48.875,37.355 47.22,35.7 Q2.3
VMCU: C1.2 Q1.3 R10.2 U1.2 | length 6.6
  Top Layer w0.5: C1.2 Q1.3 ; R10.2 Q1.3 ; U1.2 Q1.3
pads on no net: CHARGE_PORT1.EXT_SHLD LD56.2 U2.7 U3.2 U3.9 U3.10 U4.3 U4.10 U4.11

## Polygon pours and split planes (outlines as drawn)
L_GND on Bottom Layer "Bottom Layer-L_GND" (solid, pour order 3): 30,52.5 25,57.5 25,72.5 30,77.5 45,77.5 50,72.5 50,57.5 45,52.5
GND on Bottom Layer "Bottom Layer-GND" (solid, pour order 1): 30,25 25,30 25,45 30,50 45,50 50,45 50,30 45,25
L_GND on Top Layer "Top Layer-L_GND" (solid, pour order 2): 30,52.5 25,57.5 25,72.5 30,77.5 45,77.5 50,72.5 50,57.5 45,52.5
GND on Top Layer "Top Layer-GND" (solid, pour order 0): 30,25 25,30 25,45 30,50 45,50 50,45 50,30 45,25

## Other copper
Top Layer:
  region net VBAT: 40.3,27.5 40.3,27 40.9,27 40.9,27.5

## Silkscreen, mask and mechanical layers (free items; w line width, h text height)
Top Overlay:
  text "-" at 35.804,48.504 h1
  text "+" at 31.104,48.462 h1
  text "P" at 33.454,47.279 h1
  text "Rx" at 32.354,40.254 h1
  text "Tx" at 34.704,40.229 h1
Bottom Overlay:
  drawing of 18 lines, arcs and shapes, not listed
  text "Dice LED matrix - V1.0" at 47,58.27 h2
  text "Electronic Dice RGB" at 48.75,40.02 h2
  text "Version 1.0" at 41.25,37.77 h2
  text "Jan 2023" at 39.5,35.27 h2
  text "Peake Electronic Innovation" at 48.5,30.017 h2
  text "-" at 45.175,27.775 h1
  text "+" at 42.3,27.458 h1
Outline:
  the board outline again, w0.254